# EAGLE board Rocket Controller ver1.0.1 (EAGLE 9.6.2)
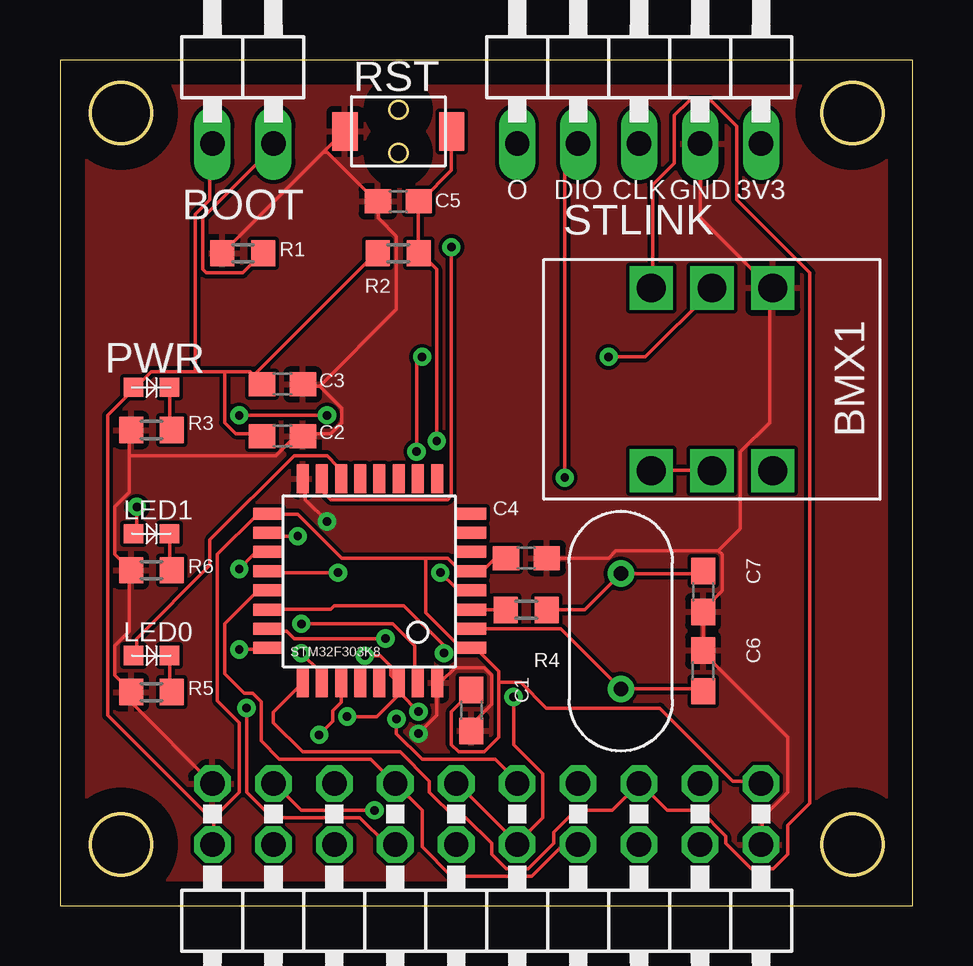
[diagram p0: board, top side]
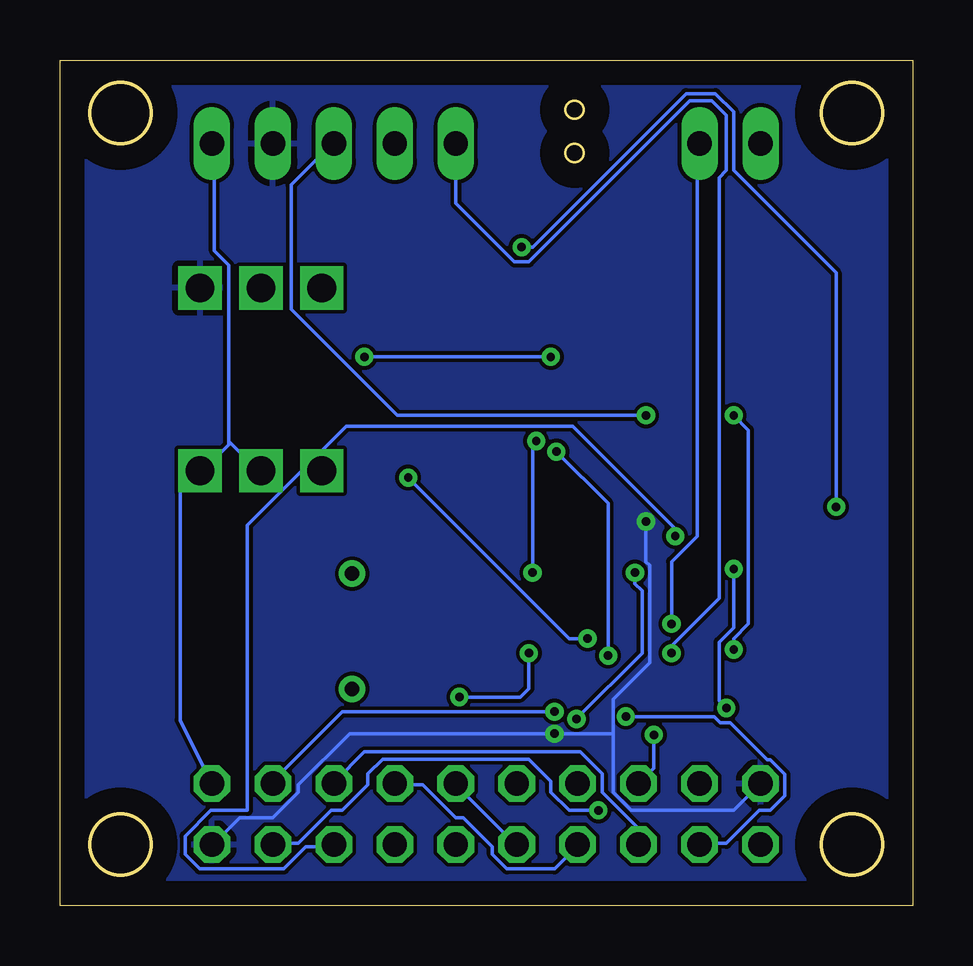
[diagram p1: board, bottom side, seen from below]

Size 35.54 x 35.23 mm. Coordinates in mm from the lower left corner, seen from the top.
Outline: 0,0 35.54,0 35.54,35.23 0,35.23 0,0
Outline: circle at 2.54,2.54 radius 1.27
Outline: circle at 33.02,2.54 radius 1.27
Outline: circle at 2.54,33.02 radius 1.27
Outline: circle at 33.02,33.02 radius 1.27
Copper layers (1*16): Top 0.035mm / dielectric 1.5mm / Bottom 0.035mm
Design rules "default": minimum track width 6mil, minimum drill 0.35mm, track to track 6mil, track to pad 6mil, pad to pad 6mil, via to via 6mil, smd to smd 6mil, copper to edge 40mil, drill to drill 6mil, minimum pad ring 10mil, minimum via ring 8mil, stop-mask expansion 4mil, vias tented up to drill 0mil, thermal gap 10mil

## Footprints (pad centres in the part's own frame; a part is rotated, then mirrored left to right if it is on the bottom)
BMX055 = drill 1.2 pad 1.5 square: 3V3 8.81,-9.53; GND 1.19,-4.46; SCL 1.19,-9.53; SDA 1.19,-7; VCC 8.81,-4.46; VCCIO 8.81,-7
1X02/90 = drill 1.016 long: 1 -1.27,-3.81; 2 1.27,-3.81
C1608 = smd 1.1 x 1: 1 -0.85,0; 2 0.85,0
CRYSTAL = drill 0.6: P$1 2.4,0; P$2 -2.4,0
2X10/90 = drill 1.016 octagon: 1 -11.43,-6.35; 2 -11.43,-3.81; 3 -8.89,-6.35; 4 -8.89,-3.81; 5 -6.35,-6.35; 6 -6.35,-3.81; 7 -3.81,-6.35; 8 -3.81,-3.81; 9 -1.27,-6.35; 10 -1.27,-3.81; 11 1.27,-6.35; 12 1.27,-3.81; 13 3.81,-6.35; 14 3.81,-3.81; 15 6.35,-6.35; 16 6.35,-3.81; 17 8.89,-6.35; 18 8.89,-3.81; 19 11.43,-6.35; 20 11.43,-3.81
OSXX1608C1A = smd 0.8 x 0.8: AN -0.75,0; CT 0.75,0
R0603 = smd 1 x 1.1: 1 -0.85,0; 2 0.85,0
TVAF06-A020B-R = smd 1.6 x 1.05: P$1 0,2.225; P$2 0,-2.225
1X05/90 = drill 1.016 long: 1 -5.08,-3.81; 2 -2.54,-3.81; 3 0,-3.81; 4 2.54,-3.81; 5 5.08,-3.81
STM32F303K8 = smd 0.5 x 1.2: BOOT 1.6,8.5; PA3/UART2_RX 0.8,0; PA4/SPI1_NSS 1.6,0; PA5/SPI1_SCK 2.4,0; PA6/SPI1_MISO 3.2,0; PA7/SPI1_MOSI 4,0; PA15/I2C1_SCL 6.4,8.5; PB0 4.8,0; PB1 5.6,0; PB3/SWO 5.6,8.5; PB4 4.8,8.5; PB5 4,8.5; PB6 3.2,8.5; PB7/I2C1_SDA 2.4,8.5; VSS 0.8,8.5; VSS2 6.4,0 | smd 1.2 x 0.5: NRST -0.65,4.65; PA0 -0.65,3.05; PA1 -0.65,2.25; PA2/UART2_TX -0.65,1.45; PA8 7.85,2.25; PA9/UART1_TX 7.85,3.05; PA10/UART1_RX 7.85,3.85; PA11/CAN_RX 7.85,4.65; PA12/CAN_TX 7.85,5.45; PA13/SWDIO 7.85,6.25; PA14/SWCLK 7.85,7.05; PF0 -0.65,6.25; PF1 -0.65,5.45; VDD -0.65,7.05; VDD2 7.85,1.45; VDDA -0.65,3.85

## Placement (x,y rotation side)
BMX1  BMX055  [BMX055]  34.16,26.92 270 top
BOOT  [1X02/90]  7.62,35.56 0 top
C1  100nF  [C1608]  17.14,8.13 270 top
C2  100nF  [C1608]  9.27,19.56 0 top
C3  4.7uF  [C1608]  9.27,21.72 0 top
C4  10nF  [C1608]  19.43,14.48 0 top
C5  0.1uF  [C1608]  14.1,29.34 180 top
C6  30pF  [C1608]  26.8,9.78 90 top
C7  30pF  [C1608]  26.8,13.08 270 top
CRY1  [CRYSTAL]  23.37,11.43 270 top
JP3  [2X10/90]  17.78,-1.27 180 top
LED0  [OSXX1608C1A]  3.81,10.41 0 top
LED1  [OSXX1608C1A]  3.81,15.49 0 top
PWR  [OSXX1608C1A]  3.81,21.59 0 top
R1  10k  [R0603]  7.62,27.18 180 top
R2  10k or DNF  [R0603]  14.1,27.18 180 top
R3  100  [R0603]  3.81,19.81 0 top
R4  DNF  [R0603]  19.43,12.32 180 top
R5  100  [R0603]  3.81,8.89 0 top
R6  100  [R0603]  3.81,13.97 0 top
RST  [TVAF06-A020B-R]  14.1,32.26 270 top
STLINK  [1X05/90]  24.13,35.56 0 top
U$1  STM32F303K8  [STM32F303K8]  16.51,17.78 180 top

## Library data of the parts
BMX1 = BMX055
BOOT JP3 STLINK = pinhead
C1-C7 = rcl; SPICEPREFIX: C
CRY1 = Crystal
LED0 LED1 PWR = Chip LED
R1-R6 = rcl; SPICEPREFIX: R
RST = Tact switch
U$1 = STM32F303K8

## Nets
+3V3: BMX1.3V3 BMX1.VCC BMX1.VCCIO BOOT.1 C1.1 C2.1 C3.1 C4.1 JP3.1 JP3.20 PWR.AN R2.2 STLINK.5 U$1.VDD U$1.VDD2 U$1.VDDA
BIT1: JP3.10 JP3.11 U$1.PA12/CAN_TX
BIT2: JP3.8 JP3.13 U$1.PA11/CAN_RX
BOOT0: BOOT.2 R1.1 U$1.BOOT
FP_CHECKER: JP3.15 U$1.PB4
GND: BMX1.GND C1.2 C2.2 C3.2 C4.2 C5.2 C6.2 C7.2 JP3.2 JP3.19 R1.2 R3.1 R5.1 R6.1 RST.P$2 STLINK.4 U$1.VSS U$1.VSS2
LED0: LED0.AN U$1.PB0
LED1: LED1.AN U$1.PB1
LOGRX: JP3.7 JP3.14 U$1.PA9/UART1_TX
LOGTX: JP3.9 JP3.12 U$1.PA10/UART1_RX
N$1: PWR.CT R3.2
N$2: LED0.CT R5.2
N$3: C7.1 CRY1.P$2 R4.1
N$4: LED1.CT R6.2
N$11: JP3.4 JP3.17
NRST: C5.1 R2.1 RST.P$1 U$1.NRST
OSC_IN: C6.1 CRY1.P$1 U$1.PF0
OSC_OUT: R4.2 U$1.PF1
PWM: JP3.6 U$1.PA8
SCL: BMX1.SCL JP3.5 JP3.16 U$1.PA15/I2C1_SCL
SDA: BMX1.SDA JP3.3 JP3.18 U$1.PB7/I2C1_SDA
SWCLK: STLINK.3 U$1.PA14/SWCLK
SWDIO: STLINK.2 U$1.PA13/SWDIO
SWO: STLINK.1 U$1.PB3/SWO

## Tracks (layer width: path | path; a pad name or v marks a point on that pad's centre or on a via)
+3V3
  Top 0.152: BMX1.3V3 24.69,18.14 27.13,18.14 BMX1.VCCIO | 6.86,22.25 7.93,22.25 8.08,22.1 | 6.86,22.25 5.64,22.25 | 5.64,22.25 3.81,22.25 3.2,21.64 PWR.AN 3.05,21.49 1.98,20.42 1.98,7.92 6.4,3.5 | 8.08,22.1 8.38,21.79 C3.1 8.08,22.1 | 6.86,22.25 6.86,20.12 7.31,19.66 8.38,19.66 C2.1 | 8.08,22.1 13.11,27.13 R2.2 | 5.64,22.25 5.64,28.8 6.25,29.41 6.25,31.7 BOOT.1 | 18.29,9.3 18.29,9.75 17.22,10.82 U$1.VDD 17.07,10.82 16.61,10.82 15.24,12.19 15.24,14.48 | 18.29,9.3 18.29,7.01 17.68,6.4 16.61,6.4 16.31,6.71 16.31,8.08 17.07,8.84 C1.1 | C4.1 18.14,14.48 17.68,14.02 17.22,14.02 U$1.VDDA 17.07,14.02 16.61,14.02 16.15,14.48 15.24,14.48 | 15.24,14.48 11.73,14.48 9.91,16.31 8.69,16.31 U$1.VDD2 8.53,16.31 8.23,16.31 6.55,14.63 6.55,8.53 7.47,7.62 7.47,4.72 6.4,3.66 6.4,3.5 | 6.4,3.5 6.4,2.59 JP3.20 | 18.29,9.3 19.2,9.3 20.27,8.23 24.99,8.23 28.04,5.18 29.11,5.18 JP3.1
  Bottom 0.152: JP3.1 30.53,7.72 30.53,17.29 BMX1.VCC 29.57,18.14 28.5,19.2 28.5,19.36 | 28.5,19.36 28.5,26.67 29.11,27.28 29.11,31.7 STLINK.5 | 28.5,19.36 27.28,18.14 BMX1.VCCIO
BIT1  (via drill 0.35)
  Top 0.152: v16,10.52 16,10.82 14.33,12.5 11.43,12.5 11.28,12.34 8.69,12.34 U$1.PA12/CAN_TX | v18.9,8.69 18.9,6.71 20.12,5.49 20.12,3.66 19.05,2.59 | 19.05,2.59 16.61,5.03 JP3.11 | 19.05,2.59 JP3.10
  Bottom 0.152: v18.9,8.69 16.36,8.69 16,9.04 v16,10.52
BIT2
  Top 0.152: U$1.PA11/CAN_RX 8.53,13.11 8.23,13.11 6.86,11.73 6.86,10.16 6.86,9.96 6.86,9.65 7.67,8.84 8.02,8.84 8.38,8.48 8.38,6.86 9.14,6.1 12.95,6.1 JP3.13 15.09,3.96 15.09,2.44 16.31,1.22 19.66,1.22 20.88,2.44 21.49,2.44 JP3.8
BOOT0  (via drill 0.35)
  Top 0.152: R1.1 8.38,27.13 7.62,26.36 6.1,26.36 5.94,26.52 5.94,28.65 8.99,31.7 BOOT.2 | v10.06,11.73 13.87,11.73 14.78,10.82 14.78,9.3 U$1.BOOT
  Bottom 0.152: v10.06,11.73 10.06,14.33 8.99,15.39 8.99,31.7 BOOT.2
FP_CHECKER  (via drill 0.35)
  Top 0.152: U$1.PB4 11.71,8.48 11.36,8.12 11.36,7.67 v10.79,7.11
  Bottom 0.152: v10.79,7.11 10.79,5.71 JP3.15
GND  (via drill 0.35)
  Top 0.152: 10.97,31.39 11.73,32.16 RST.P$2 | 10.97,31.39 6.86,27.28 R1.2 | 10.97,31.39 11.12,31.39 13.11,29.41 C5.2 13.26,29.26 13.26,28.65 14.02,27.89 14.02,24.84 10.82,21.64 | C1.2 17.22,7.32 17.22,7.62 17.98,8.38 17.98,9.6 17.68,9.91 16.46,9.91 15.85,9.3 U$1.VSS 15.7,9.14 15.7,7.92 v14.94,7.16 | 10.82,21.64 11.73,20.73 11.73,20.12 11.28,19.66 10.21,19.66 C2.2 10.06,19.51 9.75,19.51 8.99,18.75 2.9,18.75 | 10.82,21.64 10.21,21.64 C3.2 | JP3.19 3.05,8.38 3.05,8.84 R5.1 2.9,8.99 2.29,9.6 2.29,10.82 2.9,11.43 2.9,13.87 R6.1 2.9,14.02 2.29,14.63 2.29,16.61 2.9,17.22 2.9,18.75 | 2.9,18.75 2.9,19.81 R3.1 | v11.12,16 10.21,16.92 10.21,17.68 U$1.VSS2 | STLINK.4 26.67,28.65 29.57,25.76 BMX1.GND 29.57,25.6 29.57,20.12 28.35,18.9 28.35,15.7 27.43,14.78 | C4.2 22.86,14.48 23.16,14.78 27.43,14.78 | 27.43,14.78 27.58,14.63 27.58,13.11 26.82,12.34 C7.2 C6.2 26.82,10.52 30.33,7.01 30.33,4.72 29.26,3.66 29.26,2.59 JP3.2
  Bottom 0.152: v11.12,16 11.12,14.33 10.97,14.17 10.97,10.11 12.5,8.59 12.5,7.16 | 12.5,7.16 12.5,4.72 11.73,3.96 7.47,3.96 JP3.19 | 12.5,7.16 v14.94,7.16 23.47,7.16 25.6,5.03 25.6,4.72 26.67,3.66 28.04,3.66 29.11,2.59 JP3.2
  pour Bottom: -1.27,36.83 36.83,36.83 36.83,-1.27 -1.27,-1.27
  pour Top: -1.27,36.83 36.83,36.83 36.83,-1.27 -1.27,-1.27
LED0
  Top 0.152: LED0.AN 3.2,10.52 3.2,11.12 6.25,14.17 6.25,15.24 9.75,18.75 11.12,18.75 11.58,18.29 11.58,17.83 U$1.PB0
LED1  (via drill 0.35)
  Top 0.152: v3.2,16.61 3.2,15.54 LED1.AN | v16.31,27.43 16.31,17.07 16.15,16.92 11.28,16.92 10.97,17.22 10.97,17.68 U$1.PB1
  Bottom 0.152: v3.2,16.61 3.2,26.36 7.47,30.63 7.47,33.07 8.23,33.83 9.45,33.83 15.85,27.43 v16.31,27.43
LOGRX  (via drill 0.35)
  Top 0.152: v7.47,14.02 8.08,14.63 8.53,14.63 U$1.PA9/UART1_TX | v7.77,8.23 7.77,4.72 8.84,3.66 12.5,3.66 13.56,2.59 13.87,2.59 JP3.14
  Bottom 0.152: v7.47,14.02 7.47,11.58 8.08,10.97 8.08,8.53 v7.77,8.23 | JP3.7 21.49,5.03 20.42,5.03 19.05,3.66 18.75,3.66 17.53,2.44 17.53,2.13 16.92,1.52 14.94,1.52 14.02,2.44 JP3.14
LOGTX  (via drill 0.35)
  Top 0.152: v11.58,13.87 8.69,13.87 U$1.PA10/UART1_RX | v14.02,7.77 14.02,7.16 15.09,6.1 18.14,6.1 19.05,5.18 JP3.9
  Bottom 0.152: v11.58,13.87 11.58,13.41 11.28,13.11 11.28,10.52 v14.02,7.77 | JP3.12 16.61,2.59 19.05,5.03 JP3.9
N$1
  Top 0.152: PWR.CT 4.57,21.49 4.57,19.81 R3.2
N$2
  Top 0.152: LED0.CT 4.57,10.36 4.57,8.99 R5.2
N$3
  Top 0.152: R4.1 21.86,12.32 CRY1.P$2 26.7,13.83 C7.1
N$4
  Top 0.152: LED1.CT 4.57,15.39 4.57,14.02 R6.2
N$11  (via drill 0.35)
  Top 0.152: v13.11,3.96 10.06,3.96 8.99,5.03 JP3.17
  Bottom 0.152: v13.11,3.96 14.33,3.96 15.09,4.72 15.09,5.18 16,6.1 22.1,6.1 22.71,5.49 22.71,5.03 23.77,3.96 24.23,3.96 25.6,2.59 26.67,2.59 JP3.4
NRST  (via drill 0.35)
  Top 0.152: v15.85,13.87 16.46,13.26 17.07,13.26 U$1.NRST | v15.7,19.36 15.7,26.52 15.09,27.13 R2.1 14.94,27.28 14.94,29.26 C5.1 15.09,29.41 16.31,30.63 16.31,32.16 RST.P$1
  Bottom 0.152: v15.85,13.87 15.85,19.2 v15.7,19.36
OSC_IN
  Top 0.152: U$1.PF0 20.87,11.53 CRY1.P$1 26.7,9.03 C6.1
OSC_OUT
  Top 0.152: U$1.PF1 R4.2
PWM  (via drill 0.35)
  Top 0.152: v9.91,15.39 8.69,15.39 U$1.PA8
  Bottom 0.152: v9.91,15.39 9.91,15.7 14.17,19.96 23.62,19.96 27.74,15.85 27.74,3.96 29.26,3.96 30.33,2.9 30.33,2.13 29.72,1.52 26.21,1.52 25.3,2.44 24.23,2.44 JP3.6
SCL
  Top 0.152: BMX1.SCL 24.69,25.76 24.69,30.02 25.6,30.94 25.6,32.92 26.21,33.53 27.13,33.53 28.19,32.46 28.19,29.41 31.24,26.36 31.24,4.27 30.33,3.35 30.33,2.13 29.72,1.52 28.8,1.52 27.74,2.59 27.74,2.9 26.67,3.96 25.3,3.96 24.23,5.03 JP3.5 23.01,3.96 21.49,3.96 20.57,3.05 20.57,2.59 19.51,1.52 18.59,1.52 17.98,2.13 17.98,2.59 16.92,3.66 16.46,3.66 15.39,4.72 15.39,5.18 14.17,6.4 11.43,6.4 11.12,6.4 10.11,6.4 8.89,7.62 8.89,8.06 U$1.PA15/I2C1_SCL
  Bottom 0.152: JP3.16 11.43,3.2 12.95,4.72 12.95,5.49 13.87,6.4 22.86,6.4 24.08,5.18 JP3.5
SDA  (via drill 0.35)
  Top 0.152: 14.17,8.84 14.17,9.14 U$1.PB7/I2C1_SDA | v14.94,8.08 14.17,8.84 | v11.96,7.87 13.21,7.87 14.17,8.84 | 14.17,8.84 U$1.PB7/I2C1_SDA | BMX1.SDA 27.13,25.6 24.38,22.86 v22.86,22.86 | U$1.PB7/I2C1_SDA 13.79,9.6 13.79,9.97 13.35,10.41 v12.7,10.41 | v14.86,18.91 14.86,22.63 v15.09,22.86
  Bottom 0.152: v14.94,8.08 23.77,8.08 26.67,5.18 JP3.3 | JP3.18 8.84,2.59 7.77,2.59 6.4,3.96 5.94,3.96 5.33,4.57 5.33,5.46 5.94,6.07 6.07,6.07 7.62,7.62 8.02,7.62 8.28,7.87 v11.96,7.87 | v12.7,10.41 12.7,16.75 v14.86,18.91 | v15.09,22.86 v22.86,22.86
SWCLK  (via drill 0.35)
  Top 0.152: v7.47,10.67 8.53,10.67 U$1.PA14/SWCLK | v11.12,20.42 v7.47,20.42
  Bottom 0.152: v7.47,10.67 7.47,11.12 6.86,11.73 6.86,19.81 v7.47,20.42 | v11.12,20.42 21.49,20.42 25.91,24.84 25.91,30.02 24.23,31.7 STLINK.3
SWDIO  (via drill 0.35)
  Top 0.152: v13.56,11.12 9.75,11.12 9.45,11.43 8.69,11.43 U$1.PA13/SWDIO | v21.03,17.83 21.03,31.24 21.49,31.7 STLINK.2
  Bottom 0.152: v13.56,11.12 14.33,11.12 v21.03,17.83
SWO  (via drill 0.35)
  Top 0.152: v10.06,10.52 10.82,9.75 10.82,9.3 U$1.PB3/SWO
  Bottom 0.152: v10.06,10.52 10.06,10.82 8.08,12.8 8.08,30.33 7.77,30.63 7.77,32.92 8.38,33.53 9.3,33.53 16,26.82 16.61,26.82 19.05,29.26 STLINK.1

## Text on the board
tPlace: O | DIO | CLK | GND | 3V3